# Altium PCB pulseox_brakeout_LCD_PCB.PcbDoc
Units mm, origin at the board's own origin, x right, y up, seen from the top; angles counter-clockwise.
Board outline 47.4 x 44.4 mm, 2 copper layers (Top Layer, Bottom Layer); 16 components, 20 nets, 72 pads, 0 vias.
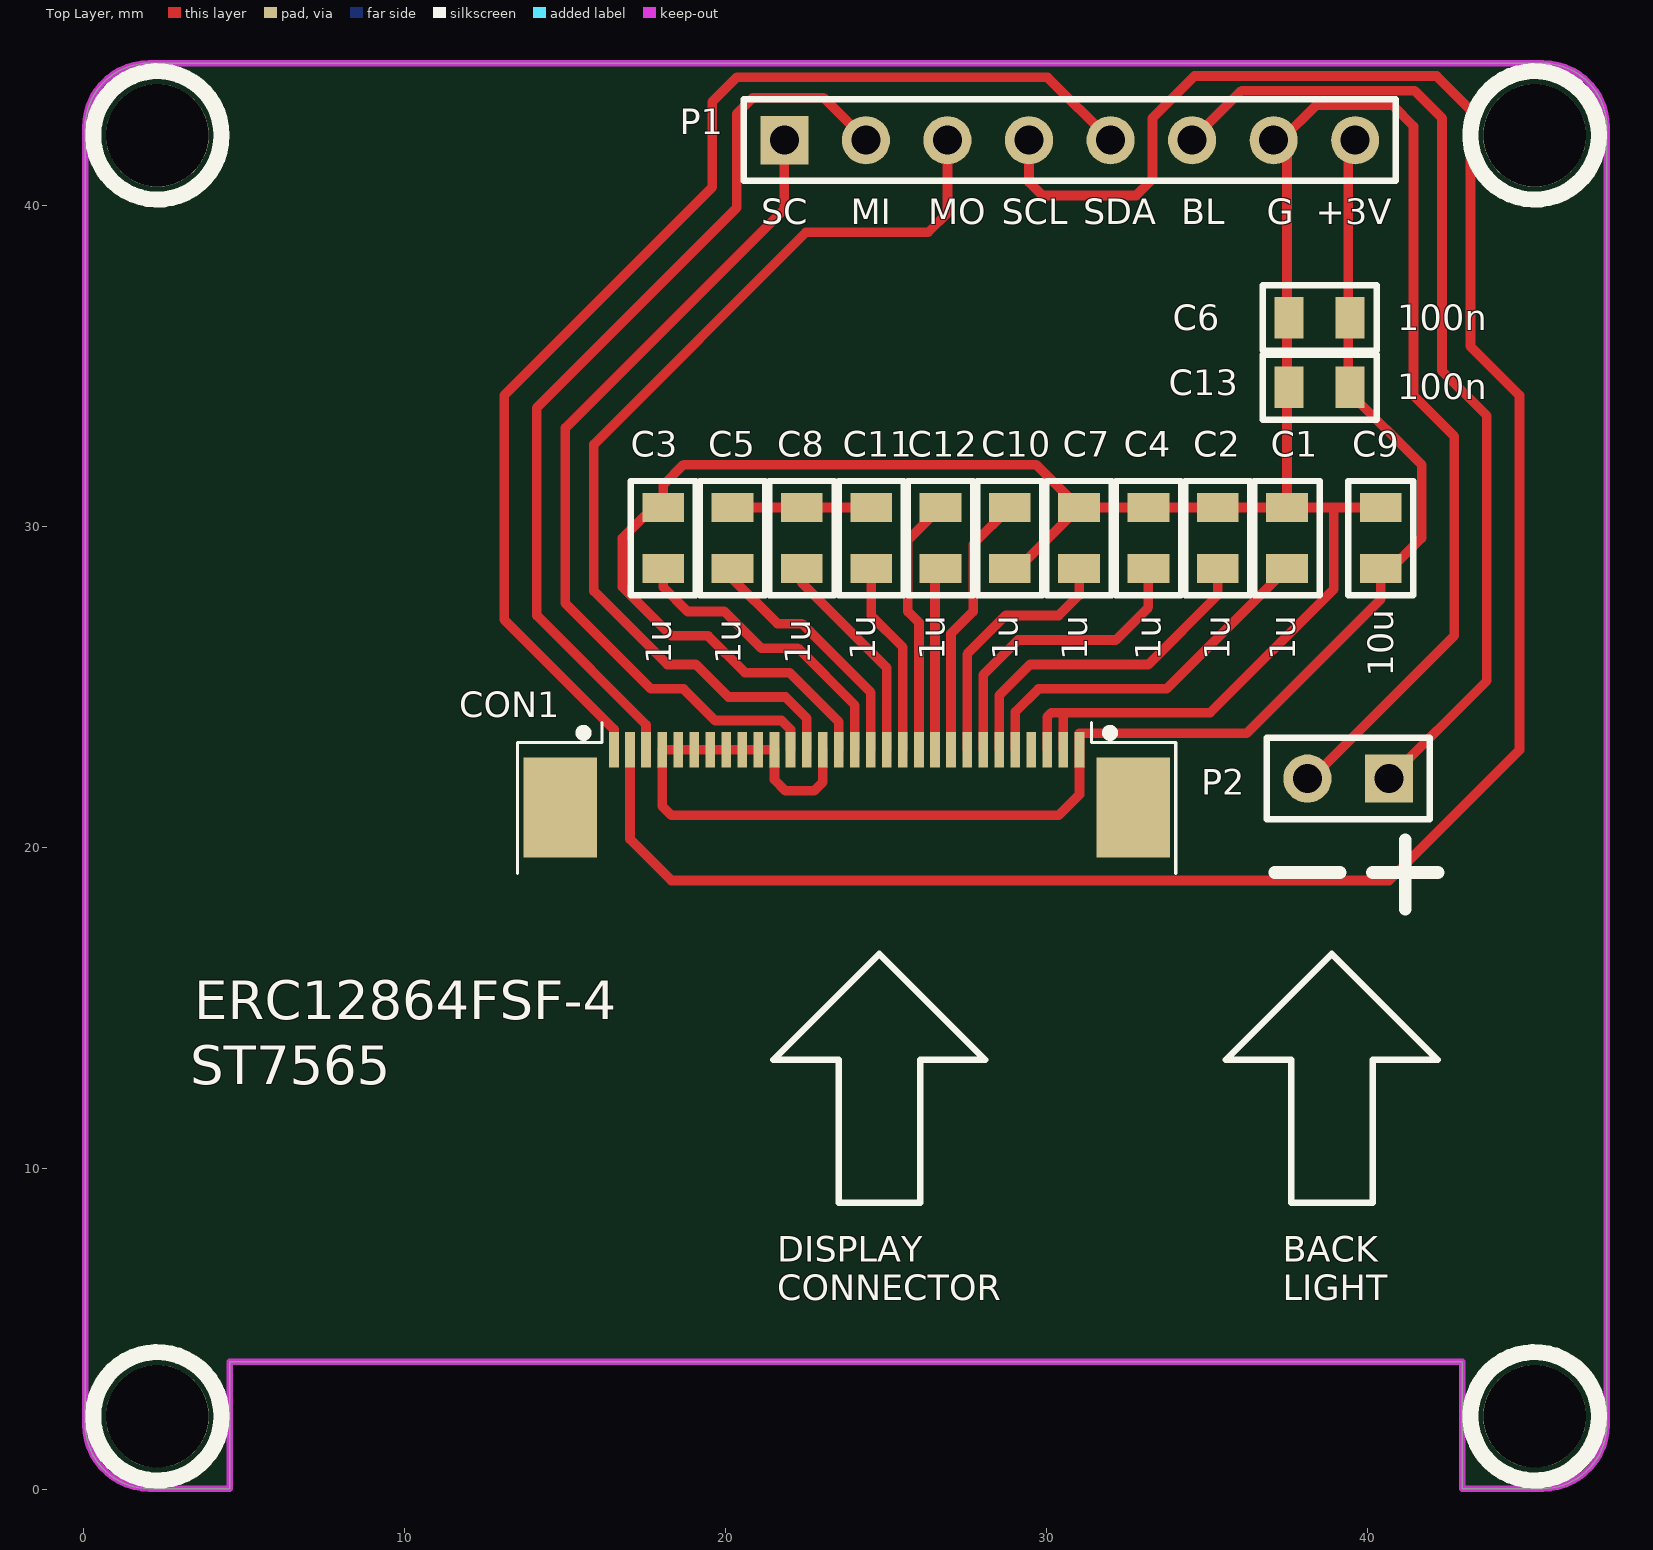
[diagram p0: Top Layer view]
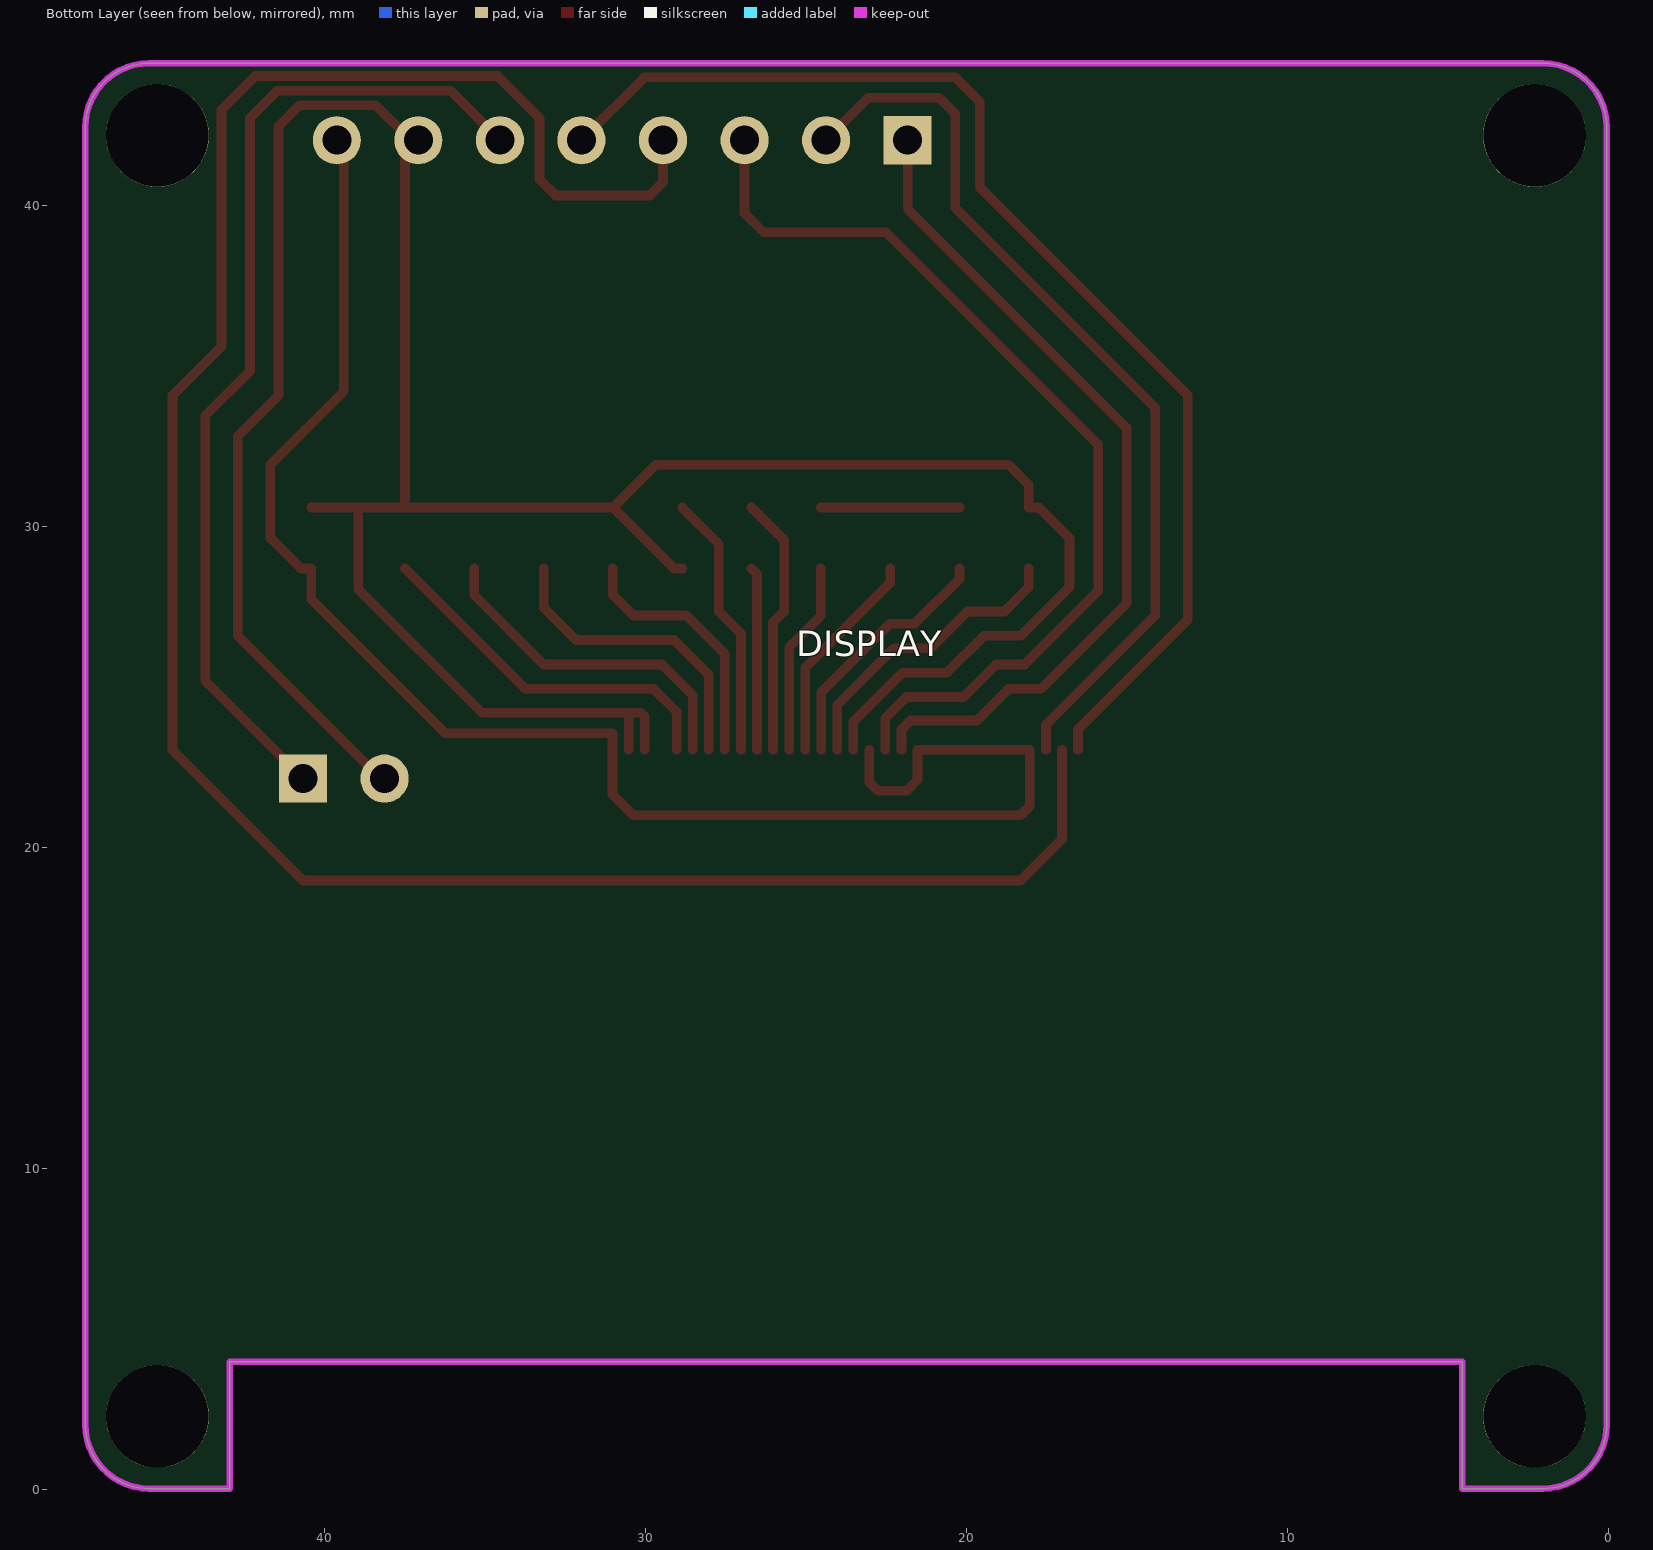
[diagram p1: Bottom Layer view, seen from below]

## Layer stack, top to bottom
Top Solder: solder mask 0.0102, Solder Resist, Dk 3.5
Top Layer: signal copper 0.0356
Dielectric 1: dielectric 0.32, FR-4, Dk 4.8
Bottom Layer: signal copper 0.0356
Bottom Solder: solder mask 0.0102, Solder Resist, Dk 3.5

## Board outline
0.066,2.032 0.066,42.432 cw(c2.066,42.432) 2.066,44.432 45.466,44.432 cw(c45.466,42.432) 47.466,42.432 47.466,2.032 cw(c45.466,2.032) 45.466,0.032 42.966,0.032 42.966,3.985 4.566,3.985 4.566,0.032 2.066,0.032 cw(c2.066,2.032)

## Design rules (kind name [scope] priority, off if disabled: settings)
Clearance [All] p1: gap=0.152 ignorepadtopadclearanceinfootprint=FALSE
PolygonConnect [All] p1: connectstyle=Relief reliefconductorwidth=0.254 reliefentries=4 polygonreliefangle="90 Angle" airgapwidth=0.254
RoutingVias [All] p1: holewidth=0.711 width=1.27 viastyle="Through Hole" minholewidth=0.711 minwidth=1.27 maxholewidth=0.711 maxwidth=1.27
SolderMaskExpansion [All] p1: expansion=0.102
Width [All] p1: maxlimit=2 minlimit=0.254 preferedwidth=0.3 minimp=50.000000 maximp=50.000000 favimp=50.000000
30 further rules are at their usual default settings.

## Components (designator, comment, footprint, x,y, rotation, side; value= is the part's Value field where it differs from the comment)
C1 "1uF /16V" CAP0805 37.504,29.639 r270 top
C2 "1uF /16V" CAP0805 35.345,29.639 r270 top
C3 "1uF /16V" CAP0805 18.073,29.639 r90 top
C4 "1uF /16V" CAP0805 33.186,29.639 r270 top
C5 "1uF /16V" CAP0805 20.232,29.639 r90 top
C6 "100nF/16V" CAP0805 38.52,36.497 r180 top
C7 "1uF /16V" CAP0805 31.027,29.639 r270 top
C8 "1uF /16V" CAP0805 22.391,29.639 r90 top
C9 "10uF /16V" CAP0805 40.425,29.639 r90 top
C10 "1uF /16V" CAP0805 28.868,29.639 r90 top
C11 "1uF /16V" CAP0805 24.55,29.639 r90 top
C12 "1uF /16V" CAP0805 26.709,29.639 r90 top
C13 "100nF/16V" CAP0805 38.52,34.338 r180 top
CON1 "3-1734592-0" "FPC P0.5mm SMT" 23.788,22.146 r270 top locked
P1 "Header 8" HDR1X8 21.846,42.032 r0 top
P2 "Header 2" HDR1X2 40.679,22.146 r180 top

## Footprints (in the part's own frame and the unit in brackets; to place one, negate y for a bottom-side part, rotate by r counter-clockwise, add the part's x,y. Pads: shape width x height; smd on the part's side, far side on the other; paste and mask are expansions set on the pad)
CAP0805 [mm]
  rect 0.9x1.3 smd: 1(-0.95,0) 2(0.95,0)
  silkscreen extent -1.78,-1.02 1.78,1.02, body extent -1,-0.6 1,0.6, height 1.5
"FPC P0.5mm SMT" [mm]
  rect 1.1x0.3 smd: 1(-0.9,-7.25) 2(-0.9,-6.75) 3(-0.9,-6.25) 4(-0.9,-5.75) 5(-0.9,-5.25) 6(-0.9,-4.75) 7(-0.9,-4.25) 8(-0.9,-3.75) 9(-0.9,-3.25) 10(-0.9,-2.75) 11(-0.9,-2.25) 12(-0.9,-1.75) 13(-0.9,-1.25) 14(-0.9,-0.75) 15(-0.9,-0.25) 16(-0.9,0.25) 17(-0.9,0.75) 18(-0.9,1.25) 19(-0.9,1.75) 20(-0.9,2.25) 21(-0.9,2.75) 22(-0.9,3.25) 23(-0.9,3.75) 24(-0.9,4.25) 25(-0.9,4.75) 26(-0.9,5.25) 27(-0.9,5.75) 28(-0.9,6.25) 29(-0.9,6.75) 30(-0.9,7.25)
  rect 3.1x2.3 smd: 31(0.9,8.925) 31(0.9,-8.925)
  silkscreen extent -1.75,-10.25 2.95,10.25, body extent -1.13,-10.21 3.98,10.22, height 2.06
HDR1X2 [mm] "Connector; Header; 2 Position"
  rect 1.5x1.5 hole 0.9: 1(0,0)
  round 1.5 hole 0.9: 2(2.54,0)
  silkscreen extent -1.27,-1.27 3.81,1.27
HDR1X8 [mm] "Connector; Header; 8 Position"
  rect 1.5x1.5 hole 0.9: 1(0,0)
  round 1.5 hole 0.9: 2(2.54,0) 3(5.08,0) 4(7.62,0) 5(10.16,0) 6(12.7,0) 7(15.24,0) 8(17.78,0)
  silkscreen extent -1.27,-1.27 19.05,1.27

## Part data
C1 C2 C3 C4 C5 C7 C8 C10 C11 C12: "MURATA - GRM21BR71C105KA01L - CAP, MLCC, X7R, 1UF, 16V, 0805", Manufacturer=MURATA, Manufacturer Part Number=GRM21BR71C105KA01L, Supplier Part Number 1=9527710, ComponentLink1Description=http://www.farnell.com/datasheets/2047889.pdf, ComponentLink1URL=http://www.farnell.com/datasheets/2047889.pdf, ComponentLink2Description=http://www.farnell.com/cad/1547313.zip, ComponentLink2URL=http://www.farnell.com/cad/1547313.zip, ComponentLink3Description=http://www.farnell.com/datasheets/2006461.pdf, ComponentLink3URL=http://www.farnell.com/datasheets/2006461.pdf, Pricing 1="5=0.0398, 50=0.0331, 250=0.0235, 500=0.022, 1500=0.018 (GBP)", RoHS=YES, Stock 1=58053, Supplier 1=Farnell
C6 C13: library part "100nF 16V 0805", "MURATA - GRM219R71C104KA01D - CAP, MLCC, X7R, 0.1UF, 16V, 0805", Capacitance=0.1, Capacitance Tolerance="± 10%", Ceramic Capacitor Case="0805 [2012 Metric]", Dielectric Characteristic=X7, Manufacturer=MURATA, Manufacturer Part Number=GRM219R71C104KA01D, Operating Temperature Max=125, Operating Temperature Min=-55, Supplier Part Number 1=2611934, Voltage Rating=16, Automotive Qualification Standard=-, ComponentLink1Description=http://www.farnell.com/datasheets/2079178.pdf, ComponentLink1URL=http://www.farnell.com/datasheets/2079178.pdf, ComponentLink2Description=http://www.farnell.com/datasheets/1935878.pdf, ComponentLink2URL=http://www.farnell.com/datasheets/1935878.pdf, MSL="MSL 1 - Unlimited", Packaging="Cut Tape", Pricing 1="10=0.0517, 100=0.0335, 500=0.0221, 1000=0.02, 2000=0.0175, 4000=0.0134, 20000=0.0095, 40000=0.0081 (GBP)", Product Range="GRM Series", RoHS=YES, Stock 1=4286, Supplier 1=Farnell, SVHC="No SVHC (17-Dec-2015"
C9: "TDK - CGA4J1X5R1C106K125AC - CAP, MLCC, X5R, 10UF, 16V, 0805", Manufacturer=TDK, Manufacturer Part Number=CGA4J1X5R1C106K125AC, Supplier Part Number 1=2210948RL, ComponentLink1Description=http://bcove.me/e1v54mtm, ComponentLink1URL=http://bcove.me/e1v54mtm, ComponentLink2Description=http://www.farnell.com/datasheets/1936565.pdf, ComponentLink2URL=http://www.farnell.com/datasheets/1936565.pdf, ComponentLink3Description=http://www.farnell.com/datasheets/1683658.pdf, ComponentLink3URL=http://www.farnell.com/datasheets/1683658.pdf, Pricing 1="5=0.41, 50=0.146, 250=0.131, 500=0.12, 1000=0.103 (GBP)", RoHS=YES, Stock 1=8974, Supplier 1=Farnell
CON1: "AMP - TE CONNECTIVITY - 3-1734592-0 - CONNECTOR, FFC / FPC, 0.5MM, 30WAY", Manufacturer="AMP - TE CONNECTIVITY", Supplier Part Number 1=1816393, ComponentLink1Description=http://www.tycoelectronics.com/commerce/DocumentDelivery/DDEController?Action=srchrtrv&DocNm=CVM_3-1734592-0&DocType=Customer+View+Model&DocLang=3D, ComponentLink1URL=http://www.tycoelectronics.com/commerce/DocumentDelivery/DDEController?Action=srchrtrv&DocNm=CVM_3-1734592-0&DocType=Customer+View+Model&DocLang=3D, ComponentLink2Description=http://www.farnell.com/cad/1650059.pdf, ComponentLink2URL=http://www.farnell.com/cad/1650059.pdf, ComponentLink3Description=http://www.farnell.com/datasheets/586796.pdf, ComponentLink3URL=http://www.farnell.com/datasheets/586796.pdf, Manufacturer Part Number=3-1734592-0, Pricing 1="1=0.616, 25=0.557, 100=0.485, 250=0.442, 500=0.399 (GBP)", RoHS=YES, Supplier 1=Farnell
P1: "Header, 8-Pin", LatestRevisionDate=17-Jul-2002, LatestRevisionNote="Re-released for DXP Platform.", Publisher="Altium Limited"
P2: "Header, 2-Pin", LatestRevisionDate=17-Jul-2002, LatestRevisionNote="Re-released for DXP Platform.", Publisher="Altium Limited"

## Free pads (board coordinates)
  round 3.2 hole 3.2 unplated: 0(2.316,2.282) 0(2.316,42.182) 0(45.216,2.282) 0(45.216,42.182)

## Nets (pads, with @x,y where several pads share a name; then routed paths per layer and width w, separated by ;. In a path a pad name is that pad's centre, name@x,y a point inside that pad or via, vN(x,y) a via of type N, cw(c..) or ccw(c..) an arc to the next point about the centre after c; other vN are vias at no path point)
+3V: C6.1 C9.1 C13.1 CON1.4 CON1.5 CON1.6 CON1.7 CON1.8 CON1.9 CON1.10 CON1.11 CON1.14 CON1.30 P1.8 | length 51.4
  Top Layer w0.3: CON1.14 23.038,22.031 22.772,21.765 21.883,21.765 21.538,22.11 CON1.11 CON1.10 CON1.9 CON1.8 CON1.7 CON1.6 CON1.5 CON1.4 18.038,21.292 18.327,21.003 30.392,21.003 31.038,21.649 CON1.30 31.038,23.554 36.245,23.554 40.425,27.734 C9.1 40.745,28.689 41.695,29.639 41.695,31.925 39.409,34.211 39.409,41.815 P1.8
B_LIGHT: P1.6 P2.1 | length 31.2
  Top Layer w0.3: P1.6 36.091,43.577 41.473,43.577 42.33,42.72 42.33,34.846 43.727,33.449 43.727,25.194 P2.1
GND: C1.1 C2.1 C3.2 C4.1 C6.2 C7.1 C9.2 C10.1 C13.2 CON1.15 CON1.28 CON1.29 P1.7 P2.2 | length 94.2
  Top Layer w0.3: CON1.15 23.538,23.92 22.01,25.448 20.613,25.448 19.47,26.591 18.327,26.591 16.803,28.115 16.803,29.639 17.753,30.589 C3.2 18.073,31.29 18.708,31.925 29.691,31.925 C7.1 ; C10.1 29.127,28.689 C7.1 ; CON1.28 30.038,24.078 30.157,24.197 30.538,24.197 ; CON1.29 30.538,24.197 ; P2.2 38.266,22.146 42.711,26.591 42.711,32.814 41.441,34.084 41.441,42.466 40.782,43.125 38.417,43.125 37.324,42.032 P1.7 37.504,41.614 C1.1 ; C9.2 38.965,30.589 ; 30.538,24.197 35.11,24.197 38.965,28.051 38.965,30.589 ; C7.1 C4.1 C2.1 C1.1 ; C1.1 38.965,30.589
NetC1_2: C1.2 CON1.26 | length 11.5
  Top Layer w0.3: CON1.26 29.038,24.221 29.757,24.94 33.755,24.94 C1.2
NetC2_2: C2.2 CON1.25 | length 10.6
  Top Layer w0.3: CON1.25 28.538,24.737 29.503,25.702 33.186,25.702 35.345,27.861 C2.2
NetC3_1: C3.1 CON1.16 | length 9.5
  Top Layer w0.3: C3.1 18.073,28.115 18.835,27.353 19.978,27.353 21.121,26.21 22.264,26.21 24.038,24.436 CON1.16
NetC4_2: C4.2 CON1.24 | length 9.6
  Top Layer w0.3: CON1.24 28.038,25.38 29.122,26.464 32.17,26.464 33.186,27.48 C4.2
NetC5_1: C5.1 CON1.17 | length 7.9
  Top Layer w0.3: C5.1 20.232,28.369 21.629,26.972 22.391,26.972 24.538,24.825 CON1.17
NetC5_2: C5.2 C8.2 C11.2 | length 4.3
  Top Layer w0.3: C5.2 C8.2 C11.2
NetC7_2: C7.2 CON1.23 | length 8.1
  Top Layer w0.3: CON1.23 27.538,26.023 28.741,27.226 30.392,27.226 31.027,27.861 C7.2
NetC8_1: C8.1 CON1.18 | length 6.7
  Top Layer w0.3: C8.1 22.391,28.242 25.038,25.595 CON1.18
NetC10_2: C10.2 CON1.22 | length 8.3
  Top Layer w0.3: CON1.22 27.038,26.666 27.725,27.353 27.725,29.446 C10.2
NetC11_1: C11.1 CON1.19 | length 6.1
  Top Layer w0.3: C11.1 24.55,27.226 25.538,26.238 CON1.19
NetC12_1: C12.1 CON1.21 | length 5.7
  Top Layer w0.3: CON1.21 26.538,28.518 C12.1
NetC12_2: C12.2 CON1.20 | length 8.1
  Top Layer w0.3: CON1.20 26.038,27.008 25.693,27.353 25.693,29.573 C12.2
PA5/SCK: CON1.12 P1.1 | length 26.5
  Top Layer w0.3: P1.1 21.846,39.889 15.025,33.068 15.025,27.607 17.692,24.94 18.708,24.94 19.692,23.956 21.756,23.956 22.038,23.674 CON1.12
PA6/MISO: CON1.3 P1.2 | length 28.6
  Top Layer w0.3: CON1.3 17.538,23.824 14.136,27.226 14.136,33.703 20.359,39.926 20.359,42.847 20.867,43.355 23.063,43.355 P1.2
PA7/MOSI: CON1.13 P1.3 | length 30.1
  Top Layer w0.3: CON1.13 22.538,24.031 21.883,24.686 20.105,24.686 19.089,25.702 18.2,25.702 15.914,27.988 15.914,32.56 22.518,39.164 26.328,39.164 26.926,39.762 P1.3
PA9/SCL: CON1.2 P1.4 | length 71.6
  Top Layer w0.3: CON1.2 17.038,20.26 18.327,18.971 40.679,18.971 44.743,23.035 44.743,34.084 43.219,35.608 43.219,42.974 42.163,44.03 34.623,44.03 33.313,42.72 33.313,40.815 32.805,40.307 29.884,40.307 29.466,40.725 P1.4
PA10/SDA: CON1.1 P1.5 | length 38.2
  Top Layer w0.3: CON1.1 16.538,23.681 13.12,27.099 13.12,34.084 19.597,40.561 19.597,43.228 20.359,43.99 30.048,43.99 P1.5 P1.5@32.371,42.032
pads on no net: CON1.27 CON1.31

## Keep-outs
Keep-Out Layer:
  lines w0.2: 45.466,0.032 ccw(c45.466,2.032) 47.466,2.032 47.466,42.432 ccw(c45.466,42.432) 45.466,44.432 2.066,44.432 ccw(c2.066,42.432) 0.066,42.432 0.066,2.032 ccw(c2.066,2.032) 2.066,0.032 4.566,0.032 4.566,3.985 42.966,3.985 42.966,0.032 45.466,0.032 ; 45.466,0.032 45.466,0.032

## Silkscreen, mask and mechanical layers (free items; w line width, h text height)
Top Overlay:
  circle w0.5: c45.216,2.282 r2
  circle w0.5: c45.216,42.182 r2
  circle w0.5: c2.316,42.182 r2
  circle w0.5: c2.316,2.282 r2
  lines w0.2: 21.502,13.383 23.534,13.383 23.534,8.938 24.804,8.938 26.074,8.938 26.074,13.383 28.106,13.383 24.804,16.685 21.502,13.383 ; 35.599,13.383 38.901,16.685 42.203,13.383 40.171,13.383 40.171,8.938 38.901,8.938 37.631,8.938 37.631,13.383 35.599,13.383
  lines w0.4: 37.123,19.225 39.155,19.225 ; 40.171,19.225 42.203,19.225 ; 41.187,18.082 41.187,20.241
  text "SC" at 21.121,39.418 h0.8
  text "MI" at 23.915,39.418 h0.8
  text "MO" at 26.328,39.418 h0.8
  text "SCL" at 28.614,39.418 h0.8
  text "SDA" at 31.154,39.418 h0.8
  text "BL" at 34.202,39.418 h0.8
  text "G" at 36.869,39.418 h0.8
  text "+3V" at 38.393,39.418 h0.8
  text "100n" at 40.933,36.116 h0.8
  text "100n" at 40.933,33.957 h0.8
  text "1u" at 24.677,25.829 h0.8 r90
  text "1u" at 26.836,25.829 h0.8 r90
  text "1u" at 29.122,25.829 h0.8 r90
  text "1u" at 31.281,25.829 h0.8 r90
  text "1u" at 33.567,25.829 h0.8 r90
  text "1u" at 35.726,25.829 h0.8 r90
  text "1u" at 37.758,25.829 h0.8 r90
  text "1u" at 18.327,25.702 h0.8 r90
  text "1u" at 20.486,25.702 h0.8 r90
  text "1u" at 22.645,25.702 h0.8 r90
  text "10u" at 40.806,25.321 h0.8 r90
  text "ERC12864FSF-4" at 3.468,14.653 h1.2
  text "ST7565" at 3.341,12.621 h1.2
  text "DISPLAY / CONNECTOR" at 21.629,5.89 h0.8
  text "BACK / LIGHT" at 37.377,5.89 h0.8
Bottom Overlay:
  text "DISPLAY" at 25.312,25.956 h0.8
Mechanical 1:
  lines w0.2: 4.566,1.532 4.566,44.387 ; 4.566,40.18 42.965,40.18 ; 42.966,1.532 42.966,44.431

## Dimensions
42.966,0.032 to 4.566,0.032 on Mechanical 1
45.216,42.182 to 39.626,42.032 on Mechanical 1
45.216,42.182 to 45.216,2.282 on Mechanical 1
2.316,42.182 to 45.216,42.182 on Mechanical 1
0.066,42.432 to 47.466,42.432 on Mechanical 1
2.066,44.432 to 4.566,0.032 on Mechanical 1
21.846,42.032 to 2.066,44.432 on Mechanical 1
4.566,0.032 to 4.566,3.985 on Mechanical 1